# Altium PCB cm4-carrier-net.PcbDoc (part 1 of 2)
Units mm, origin at the board's own origin, x right, y up, seen from the top; angles counter-clockwise.
Board outline 91.42 x 56.51 mm, 4 copper layers (F.Cu, In1.Cu, In2.Cu, B.Cu); 70 components, 204 nets, 587 pads, 137 vias.
Unrouted connection lines stored in the file: 70.
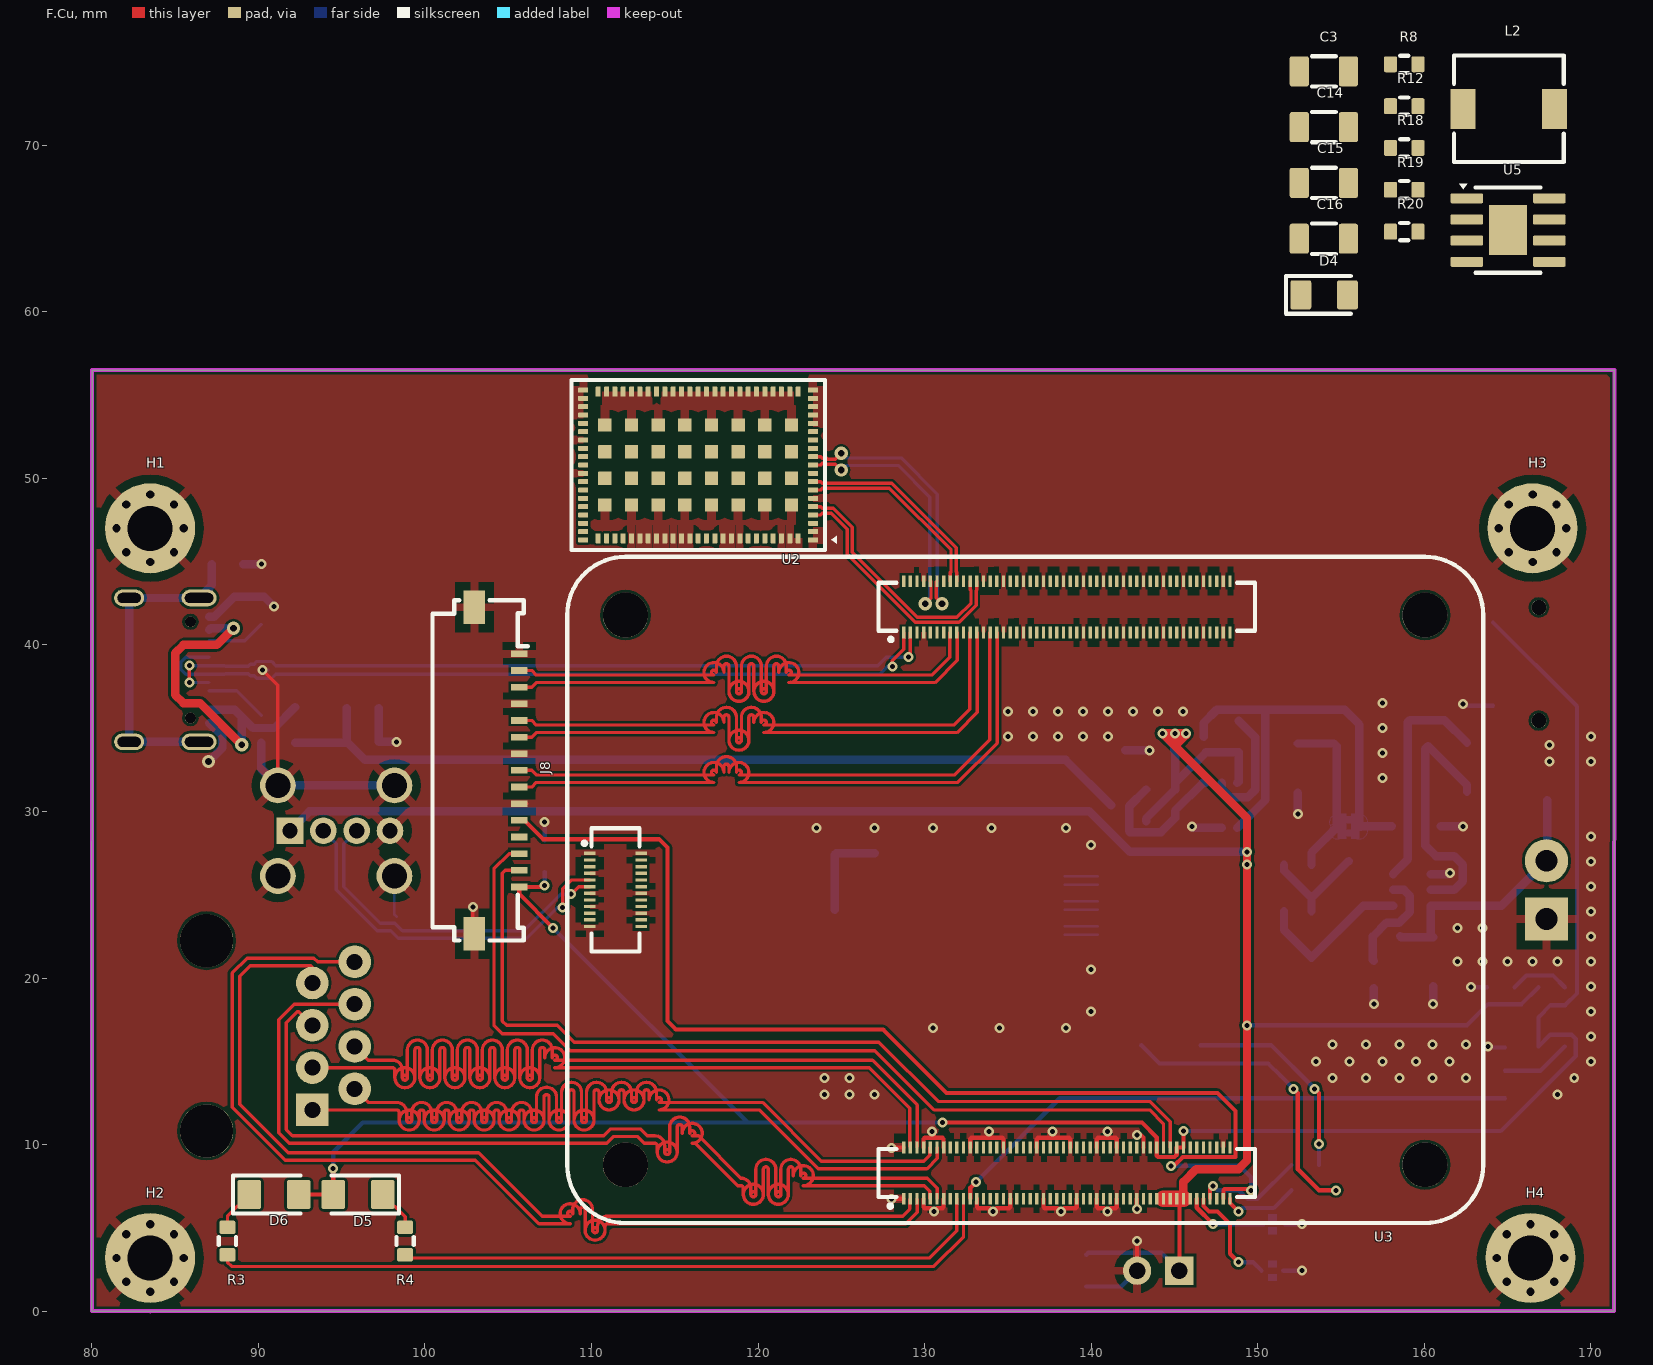
[diagram p0: F.Cu view]
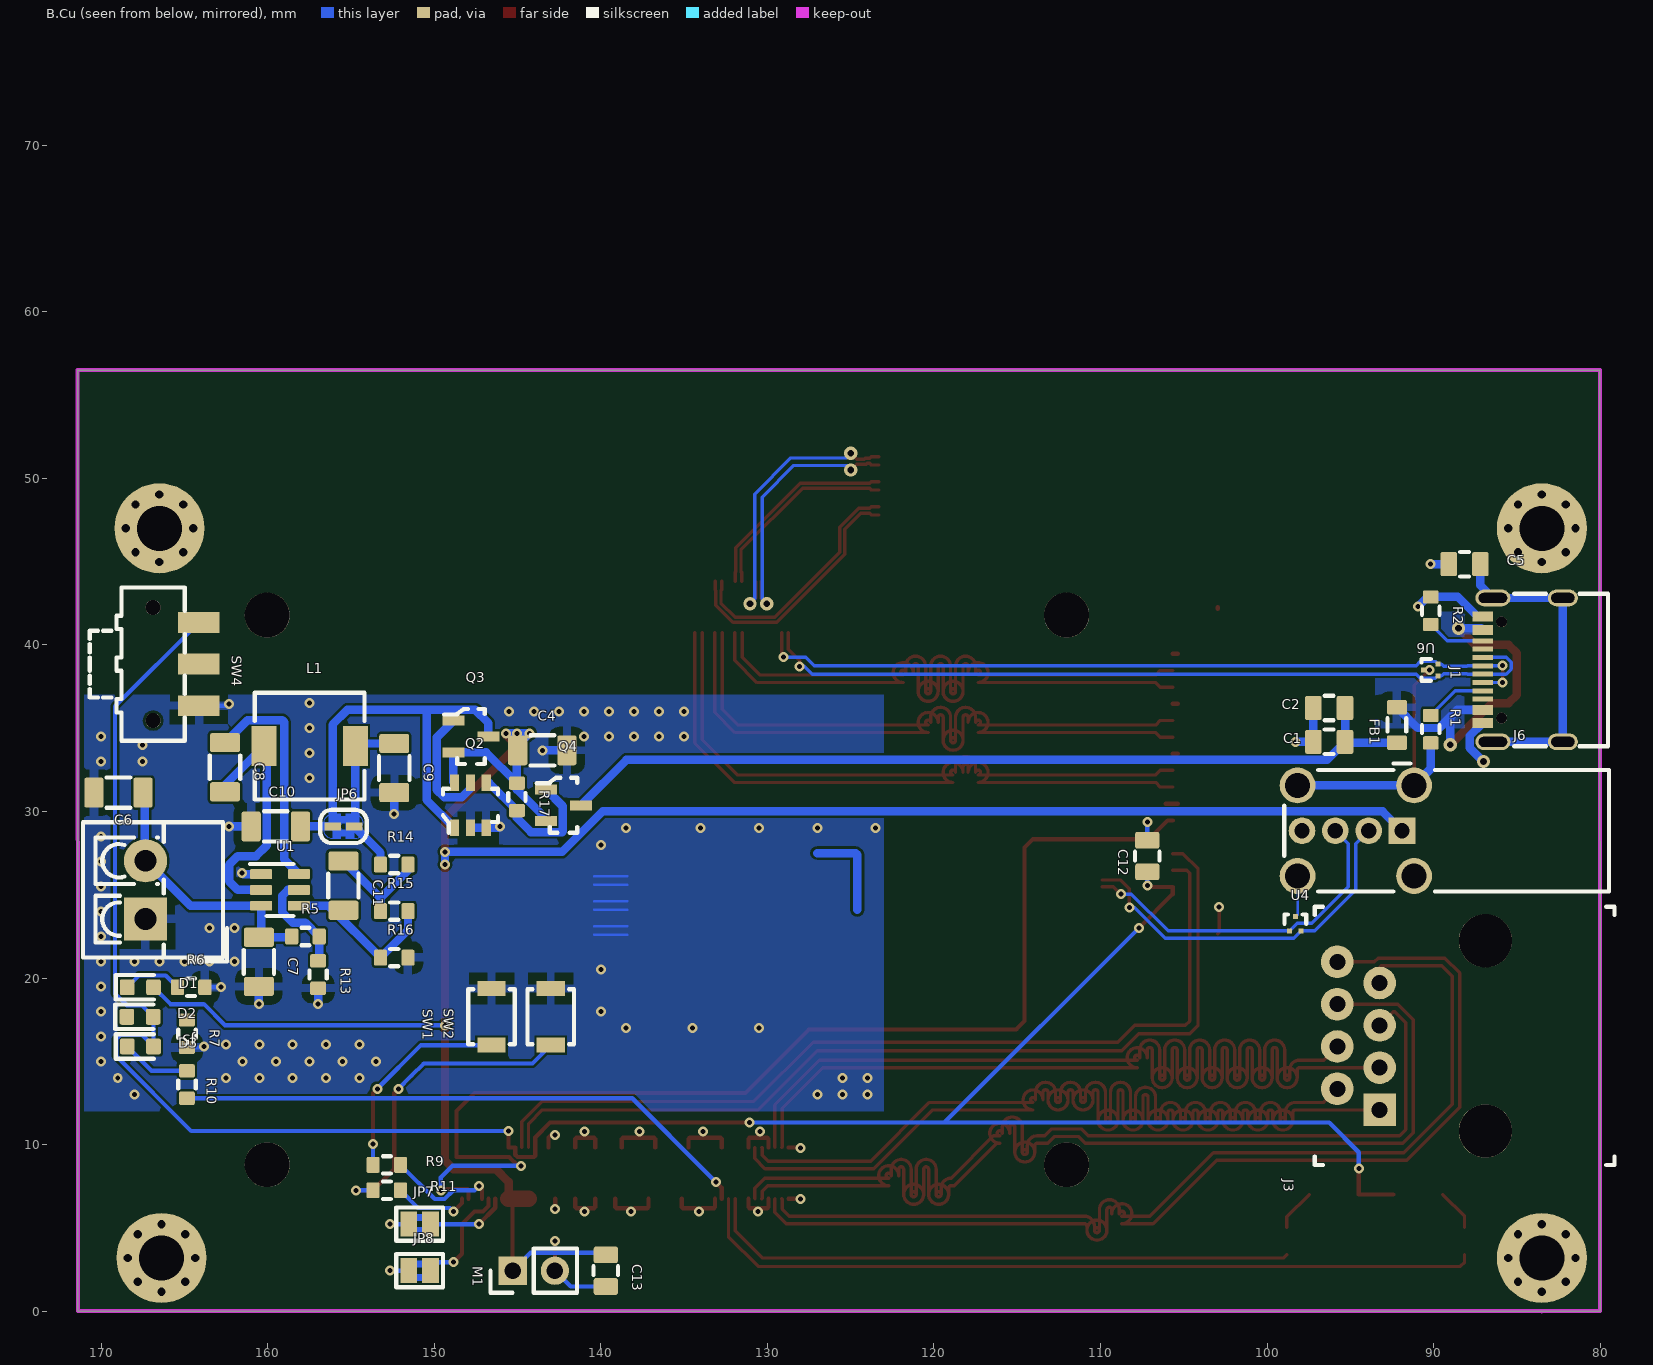
[diagram p1: B.Cu view, seen from below]
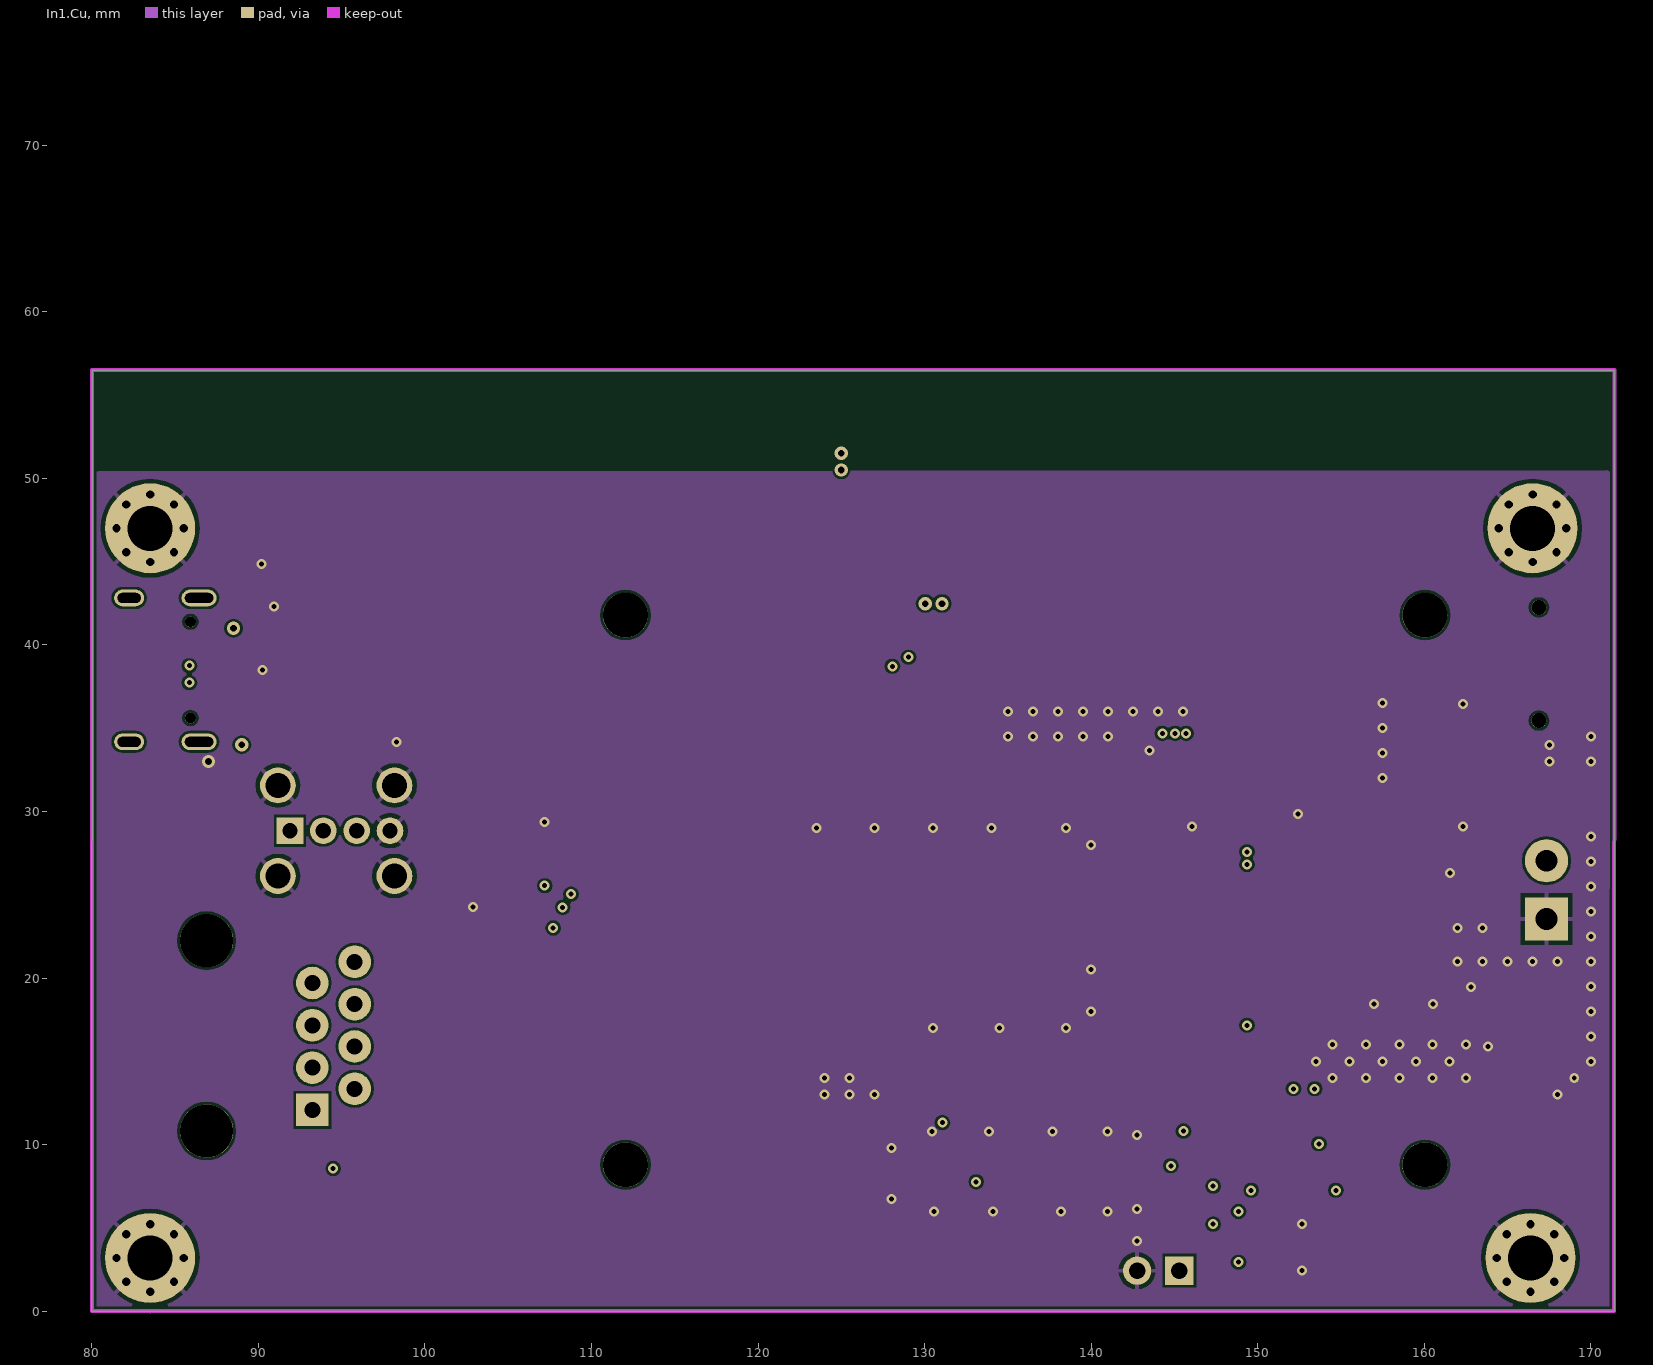
[diagram p2: In1.Cu]
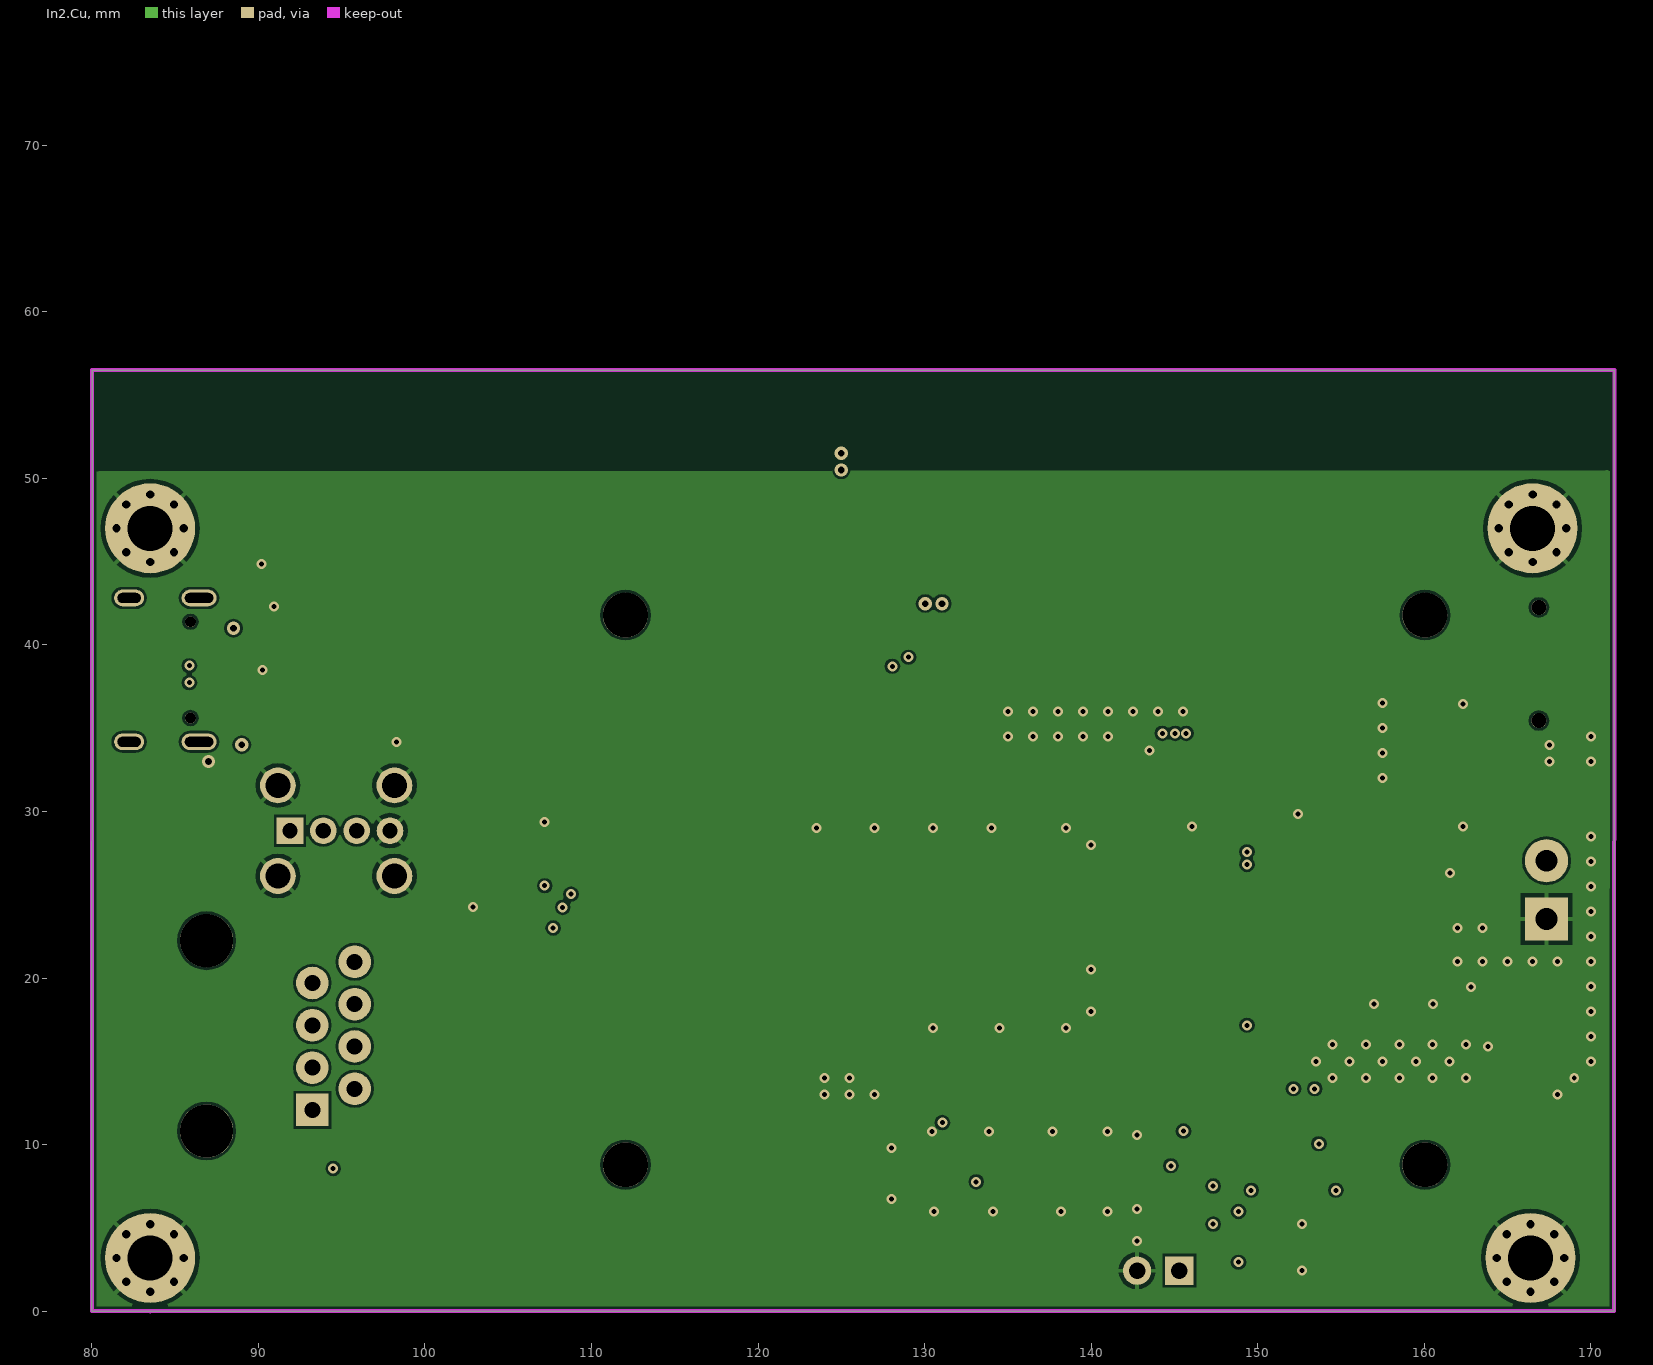
[diagram p3: In2.Cu]

## Layer stack, top to bottom
F.Mask: solder mask 0.0102, Solder Resist, Dk 3.5
F.Cu: signal copper 0.0356
Dielectric 1: dielectric 0.32, FR-4, Dk 4.8
In1.Cu: signal copper 0.0356
Dielectric2: dielectric 0.32, FR-4, Dk 4.8
In2.Cu: signal copper 0.0356
Dielectric3: dielectric 0.32, FR-4, Dk 4.8
B.Cu: signal copper 0.0356
B.Mask: solder mask 0.0102, Solder Resist, Dk 3.5

## Board outline
171.416,56.506 171.394,0.006 83.5,0 80,0.006 80.01,56.506 171.416,56.506

## Design rules (kind name [scope] priority, off if disabled: settings)
Clearance "Clearence 0.1524_Polygon" [InNamedPolygon('F.Cu-GND') OR InNamedPolygon('In1.Cu-GND') OR InNamedPolygon('In2.Cu-GND') OR InNamedPolygon('B.Cu-/USB_VBUS') OR InNamedPolygon('B.Cu-GND')] p1: gap=0.152 ignorepadtopadclearanceinfootprint=FALSE
MinimumSolderMaskSliver [All] p1: minsoldermaskwidth=0
PolygonConnect Polygon_B.Cu-GND_ConnectDirect [IsNamedPolygon('B.Cu-GND') vs IsVia] p1: connectstyle=Direct reliefconductorwidth=0.254 reliefentries=4 polygonreliefangle="90 Angle" airgapwidth=0.254
PolygonConnect Polygon_B.Cu-GND_ConnectRelief45 [IsNamedPolygon('B.Cu-GND') vs (IsThruPin or IsSMTPin) and (PadShape_AllLayers = 'Round')] p2: connectstyle=Relief reliefconductorwidth=0.5 reliefentries=4 polygonreliefangle="45 Angle" airgapwidth=0.5
PolygonConnect Polygon_B.Cu-GND_ConnectRelief90 [IsNamedPolygon('B.Cu-GND') vs (IsThruPin or IsSMTPin) and (PadShape_AllLayers <> 'Round')] p3: connectstyle=Relief reliefconductorwidth=0.5 reliefentries=4 polygonreliefangle="90 Angle" airgapwidth=0.5
PolygonConnect Polygon_B.Cu-/USB_VBUS_ConnectDirect [IsNamedPolygon('B.Cu-/USB_VBUS') vs IsVia] p4: connectstyle=Direct reliefconductorwidth=0.254 reliefentries=4 polygonreliefangle="90 Angle" airgapwidth=0.254
PolygonConnect Polygon_B.Cu-/USB_VBUS_ConnectRelief45 [IsNamedPolygon('B.Cu-/USB_VBUS') vs (IsThruPin or IsSMTPin) and (PadShape_AllLayers = 'Round')] p5: connectstyle=Relief reliefconductorwidth=0.5 reliefentries=4 polygonreliefangle="45 Angle" airgapwidth=0.5
PolygonConnect Polygon_B.Cu-/USB_VBUS_ConnectRelief90 [IsNamedPolygon('B.Cu-/USB_VBUS') vs (IsThruPin or IsSMTPin) and (PadShape_AllLayers <> 'Round')] p6: connectstyle=Relief reliefconductorwidth=0.5 reliefentries=4 polygonreliefangle="90 Angle" airgapwidth=0.5
PolygonConnect Polygon_In2.Cu-GND_ConnectDirect [IsNamedPolygon('In2.Cu-GND') vs IsVia] p7: connectstyle=Direct reliefconductorwidth=0.254 reliefentries=4 polygonreliefangle="90 Angle" airgapwidth=0.254
PolygonConnect Polygon_In2.Cu-GND_ConnectRelief45 [IsNamedPolygon('In2.Cu-GND') vs (IsThruPin or IsSMTPin) and (PadShape_AllLayers = 'Round')] p8: connectstyle=Relief reliefconductorwidth=0.254 reliefentries=4 polygonreliefangle="45 Angle" airgapwidth=0.254
PolygonConnect Polygon_In2.Cu-GND_ConnectRelief90 [IsNamedPolygon('In2.Cu-GND') vs (IsThruPin or IsSMTPin) and (PadShape_AllLayers <> 'Round')] p9: connectstyle=Relief reliefconductorwidth=0.254 reliefentries=4 polygonreliefangle="90 Angle" airgapwidth=0.254
PolygonConnect Polygon_In1.Cu-GND_ConnectDirect [IsNamedPolygon('In1.Cu-GND') vs IsVia] p10: connectstyle=Direct reliefconductorwidth=0.254 reliefentries=4 polygonreliefangle="90 Angle" airgapwidth=0.254
PolygonConnect Polygon_In1.Cu-GND_ConnectRelief45 [IsNamedPolygon('In1.Cu-GND') vs (IsThruPin or IsSMTPin) and (PadShape_AllLayers = 'Round')] p11: connectstyle=Relief reliefconductorwidth=0.254 reliefentries=4 polygonreliefangle="45 Angle" airgapwidth=0.254
PolygonConnect Polygon_In1.Cu-GND_ConnectRelief90 [IsNamedPolygon('In1.Cu-GND') vs (IsThruPin or IsSMTPin) and (PadShape_AllLayers <> 'Round')] p12: connectstyle=Relief reliefconductorwidth=0.254 reliefentries=4 polygonreliefangle="90 Angle" airgapwidth=0.254
PolygonConnect Polygon_F.Cu-GND_ConnectDirect [IsNamedPolygon('F.Cu-GND') vs IsVia] p13: connectstyle=Direct reliefconductorwidth=0.254 reliefentries=4 polygonreliefangle="90 Angle" airgapwidth=0.254
PolygonConnect Polygon_F.Cu-GND_ConnectRelief45 [IsNamedPolygon('F.Cu-GND') vs (IsThruPin or IsSMTPin) and (PadShape_AllLayers = 'Round')] p14: connectstyle=Relief reliefconductorwidth=0.5 reliefentries=4 polygonreliefangle="45 Angle" airgapwidth=0.5
PolygonConnect Polygon_F.Cu-GND_ConnectRelief90 [IsNamedPolygon('F.Cu-GND') vs (IsThruPin or IsSMTPin) and (PadShape_AllLayers <> 'Round')] p15: connectstyle=Relief reliefconductorwidth=0.5 reliefentries=4 polygonreliefangle="90 Angle" airgapwidth=0.5
RoutingVias [All] p1: holewidth=0.711 width=1.27 viastyle="Through Hole" minholewidth=0.711 minwidth=1.27 maxholewidth=0.711 maxwidth=1.27
SilkToSilkClearance [All] p1: silktosilkclearance=0
SilkToSolderMaskClearance [IsPad] p1: minsilkscreentomaskgap=0 clearancetoexposedcopper=TRUE
SolderMaskExpansion [All] p1: expansion=0.102 istentingtop=FALSE
Width [All] p1: maxlimit=10 minlimit=0.254 preferedwidth=0.254 minimp=50.000000 maximp=50.000000 favimp=50.000000
27 further rules are at their usual default settings.

## Components (designator, comment, footprint, x,y, rotation, side; value= is the part's Value field where it differs from the comment)
C1 "Comment" C_0805_2012Metric 96.266,34.184 r180 bottom value=22u
C2 "Comment" C_0805_2012Metric 96.266,36.216 r180 bottom value=22u
C3 "Comment" C_1206_3216Metric#1 153.965,74.441 r0 top value=10uF
C4 "Comment" C_1206_3216Metric#2 143.51,33.676 r0 bottom value=22uF
C5 "Comment" C_0805_2012Metric 88.138,44.852 r180 bottom value=100n
C6 "Comment" C_1206_3216Metric#2 168.959,31.136 r180 bottom value=10uF
C7 "Comment" C_1206_3216Metric#2 160.528,20.976 r90 bottom value=0.1uF
C8 "Comment" C_1206_3216Metric#2 162.56,32.66 r90 bottom value=0.1uF
C9 "Comment" C_1206_3216Metric#2 152.4,32.611 r90 bottom value=22uF
C10 "Comment" C_1206_3216Metric#2 159.512,29.104 r0 bottom value=22uF
C11 "Comment" C_1206_3216Metric#2 155.448,25.548 r90 bottom value=75pF
C12 "Comment" C_0805_2012Metric 107.188,27.326 r270 bottom value=22u
C13 "Comment" C_0805_2012Metric 139.7,2.434 r90 bottom value=22u
C14 "Comment" C_1206_3216Metric#1 153.965,71.091 r0 top value=0.1uF
C15 "Comment" C_1206_3216Metric#1 153.965,67.741 r0 top value=47uF
C16 "Comment" C_1206_3216Metric#1 153.965,64.391 r0 top value=47uF
D1 "Comment" LED_0603_1608Metric 167.64,19.452 r0 bottom value="USB Power"
D2 "Comment" LED_0603_1608Metric 167.665,17.674 r0 bottom value="RPi 3v3"
D3 "Comment" LED_0603_1608Metric 167.64,15.896 r0 bottom value="Activity LED"
D4 "Comment" D_1206_3216Metric 153.985,61.021 r0 top value=D
D5 "Comment" D_1206_3216Metric_Pad1.42x1.75mm_HandSolder 95.982,7.006 r180 top value=LED
D6 "Comment" D_1206_3216Metric_Pad1.42x1.75mm_HandSolder 90.932,7.006 r0 top value=LED
FB1 "Comment" L_0805_2012Metric 92.202,35.2 r270 bottom value=FB
H1 "Comment" MountingHole_2.7mm_M2.5_Pad_Via 83.5,47.006 r0 top value=MountingHole_Pad
H2 "Comment" MountingHole_2.7mm_M2.5_Pad_Via 83.5,3.196 r0 top value=MountingHole_Pad
H3 "Comment" MountingHole_2.7mm_M2.5_Pad_Via 166.5,47.006 r0 top value=MountingHole_Pad
H4 "Comment" MountingHole_2.7mm_M2.5_Pad_Via 166.37,3.196 r0 top value=MountingHole_Pad
J1 "Comment" USB_C_Receptacle_G-Switch_GT-USB-7010ASV 83.312,38.502 r270 bottom value=USB_C_Receptacle_USB2.0
J3 "Comment" Ethernet_Jack_54602-908LF 93.238,12.086 r270 bottom value=54602-908LF
J5 "Comment" TerminalBlock_4Ucon_1x02_P3.50mm_Vertical 167.333,23.544 r270 bottom value=block
J6 "Comment" USB_A_Wuerth_614004134726_Horizontal 91.898,28.85 r180 bottom value=USB_A
J8 "Comment" Molex_200528-0150_1x15-1MP_P1.00mm_Horizontal 104.754,32.47 r270 top value=Conn_01x15_MountingPin
JP6 "Comment" SolderJumper-2_P1.3mm_Bridged2Bar_RoundedPad1.0x1.5mm 155.448,29.104 r0 bottom value=SolderJumper_2_Bridged
JP7 "Comment" SolderJumper-2_P1.3mm_Bridged2Bar_Pad1.0x1.5mm 150.876,5.228 r0 bottom value=~WL_nDisable
JP8 "Comment" SolderJumper-2_P1.3mm_Bridged2Bar_Pad1.0x1.5mm 150.876,2.434 r0 bottom value=~BT_nDisable
L1 "Comment" L_6.3x6.3_H3#1 157.48,33.93 r0 bottom value=10uH
L2 "Comment" L_6.3x6.3_H3#2 165.075,72.191 r0 top value=0.1uH
M1 "Comment" PinHeader_1x02_P2.54mm_Vertical 145.293,2.434 r270 bottom value=Fan
Q2 "Comment" SOT-23-6#1 147.828,30.374 r0 bottom value=LTC4412ES6_TRMPBF
Q3 "Comment" SOT-23-3 147.794,34.504 r0 bottom value=IRLML6401TRPBF
Q4 "Comment" SOT-23-3 142.24,30.374 r0 bottom value=IRLML6401TRPBF
R1 "Comment" R_0603_1608Metric#1 90.17,34.946 r270 bottom value=5k1
R2 "Comment" R_0603_1608Metric#1 90.17,42.058 r90 bottom value=5k1
R3 "Comment" R_0603_1608Metric#2 88.138,4.212 r270 top value=220R
R4 "Comment" R_0603_1608Metric#2 98.806,4.212 r270 top value=220R
R5 "Comment" R_0603_1608Metric#1 157.734,22.5 r0 bottom value=511kOhm
R6 "Comment" R_0603_1608Metric#1 164.592,19.452 r0 bottom value=330R
R7 "Comment" R_0603_1608Metric#1 164.846,16.658 r90 bottom value=220R
R8 "Comment" R_0603_1608Metric#2 158.795,74.861 r0 top value=56kOhm
R9 "Comment" R_0603_1608Metric#1 152.845,8.784 r0 bottom value=220R
R10 "Comment" R_0603_1608Metric#1 164.846,13.61 r270 bottom value=220R
R11 "Comment" R_0603_1608Metric#1 152.845,7.26 r0 bottom value=220R
R12 "Comment" R_0603_1608Metric#2 158.795,72.351 r0 top value=10.2kOhm
R13 "Comment" R_0603_1608Metric#1 156.972,20.214 r90 bottom value=105kOhm
R14 "Comment" R_0603_1608Metric#1 152.4,26.818 r0 bottom value=49.9Ohm
R15 "Comment" R_0603_1608Metric#1 152.4,24.024 r0 bottom value=100kOhm
R16 "Comment" R_0603_1608Metric#1 152.4,21.23 r0 bottom value=13.3kOhm
R17 "Comment" R_0603_1608Metric#1 145.034,30.882 r90 bottom value=470kOhm
R18 "Comment" R_0603_1608Metric#2 158.795,69.841 r0 top value=100kOhm
R19 "Comment" R_0603_1608Metric#2 158.795,67.331 r0 top value=31.6kOhm
R20 "Comment" R_0603_1608Metric#2 158.795,64.821 r0 top value=10.2kOhm
SW1 "Comment" SW_SPST_B3U-1000P 146.558,17.674 r270 bottom value=BOOT
SW2 "Comment" SW_SPST_B3U-1000P 143.002,17.674 r270 bottom value=GLOBAL_EN
SW4 "Comment" SW_SPDT_CK-JS102011SAQN 166.878,38.854 r90 bottom value=USB_OTG
U1 "Comment" SOT-23-6#2 159.258,25.294 r0 bottom value=TPS54302
U2 "Comment" Google_Coral_SMT_TPU_Module 123.3,46.306 r180 top value=Google_Coral
U3 "Comment" MODULE_ORANGE_PI_CM4 136.036,25.294 r180 top value=ORANGE_PI_CM4
U4 "Comment" Texas_DRT-3 98.298,23.262 r0 bottom value=TPD2EUSB30
U5 "Comment" SOIC-8-1EP_3.9x4.9mm_P1.27mm_EP2.29x3mm 165.025,64.911 r0 top value=ADP2303ARDZ-3.3
U6 "Comment" Texas_DRT-3 90.17,38.502 r270 bottom value=TPD2EUSB30

## Footprints (in the part's own frame and the unit in brackets; to place one, negate y for a bottom-side part, rotate by r counter-clockwise, add the part's x,y. Pads: shape width x height; smd on the part's side, far side on the other; paste and mask are expansions set on the pad)
C_0805_2012Metric [mm]
  rrect25% 1x1.45 smd mask+0: 1(0.95,0) 2(-0.95,0)
  silkscreen extent -0.26,-0.73 0.26,0.73
C_1206_3216Metric#1 [mm]
  rrect22% 1.15x1.8 smd mask+0: 1(-1.475,0) 2(1.475,0)
  silkscreen extent -0.71,-0.91 0.71,0.91
C_1206_3216Metric#2 [mm]
  rrect22% 1.15x1.8 smd mask+0: 1(1.475,0) 2(-1.475,0)
  silkscreen extent -0.71,-0.91 0.71,0.91
D_1206_3216Metric [mm]
  rrect20% 1.25x1.75 smd mask+0: 1(-1.4,0) 2(1.4,0)
  silkscreen extent -2.28,-1.13 1.6,1.13
D_1206_3216Metric_Pad1.42x1.75mm_HandSolder [mm]
  rrect18% 1.425x1.75 smd mask+0: 1(-1.488,0) 2(1.488,0)
  silkscreen extent -2.46,-1.13 1.6,1.13
Ethernet_Jack_54602-908LF [mm]
  rect 1.96x1.96 hole 0.96 paste-2539.97 mask+0: 1(0,0)
  round 1.96 hole 0.96 paste-2539.97 mask+0: 2(-1.27,-2.54) 3(-2.54,0) 4(-3.81,-2.54) 5(-5.08,0) 6(-6.35,-2.54) 7(-7.62,0) 8(-8.89,-2.54)
  round 3.2 hole 3.2 paste-2539.97 mask+0: Un1(1.27,6.35) Un2(-10.16,6.35)
  silkscreen extent -12.2,-3.9 3.3,14.1
Google_Coral_SMT_TPU_Module [mm]
  rrect17% 0.6x0.3 smd mask+0: 1(0,0) 2(0,-0.5) 3(0,-1) 4(0,-1.5) 5(0,-2) 6(0,-2.5) 7(0,-3) 8(0,-3.5) 9(0,-4) 10(0,-4.5) 11(0,-5) 12(0,-5.5) 13(0,-6) 14(0,-6.5) 15(0,-7) 16(0,-7.5) 17(0,-8) 18(0,-8.5) 19(0,-9) 45(13.8,-9) 46(13.8,-8.5) 47(13.8,-8) 48(13.8,-7.5) 49(13.8,-7) 50(13.8,-6.5) 51(13.8,-6) 52(13.8,-5.5) 53(13.8,-5) 54(13.8,-4.5) 55(13.8,-4) 56(13.8,-3.5) 57(13.8,-3) 58(13.8,-2.5) 59(13.8,-2) 60(13.8,-1.5) 61(13.8,-1) 62(13.8,-0.5) 63(13.8,0)
  rrect17% 0.3x0.6 smd mask+0: 20(0.9,-8.9) 21(1.4,-8.9) 22(1.9,-8.9) 23(2.4,-8.9) 24(2.9,-8.9) 25(3.4,-8.9) 26(3.9,-8.9) 27(4.4,-8.9) 28(4.9,-8.9) 29(5.4,-8.9) 30(5.9,-8.9) 31(6.4,-8.9) 32(6.9,-8.9) 33(7.4,-8.9) 34(7.9,-8.9) 35(8.4,-8.9) 36(8.9,-8.9) 37(9.4,-8.9) 38(9.9,-8.9) 39(10.4,-8.9) 40(10.9,-8.9) 41(11.4,-8.9) 42(11.9,-8.9) 43(12.4,-8.9) 44(12.9,-8.9) 64(12.9,-0.1) 65(12.4,-0.1) 66(11.9,-0.1) 67(11.4,-0.1) 68(10.9,-0.1) 69(10.4,-0.1) 70(9.9,-0.1) 71(9.4,-0.1) 72(8.9,-0.1) 73(8.4,-0.1) 74(7.9,-0.1) 75(7.4,-0.1) 76(6.9,-0.1) 77(6.4,-0.1) 78(5.9,-0.1) 79(5.4,-0.1) 80(4.9,-0.1) 81(4.4,-0.1) 82(3.9,-0.1) 83(3.4,-0.1) 84(2.9,-0.1) 85(2.4,-0.1) 86(1.9,-0.1) 87(1.4,-0.1) 88(0.9,-0.1)
  rrect6% 0.8x0.8 smd mask+0: 89(12.5,-2.1) 90(10.9,-2.1) 91(9.3,-2.1) 92(7.7,-2.1) 93(6.1,-2.1) 94(4.5,-2.1) 95(2.9,-2.1) 96(1.3,-2.1) 97(12.5,-3.7) 98(10.9,-3.7) 99(9.3,-3.7) 100(7.7,-3.7) 101(6.1,-3.7) 102(4.5,-3.7) 103(2.9,-3.7) 104(1.3,-3.7) 105(12.5,-5.3) 106(10.9,-5.3) 107(9.3,-5.3) 108(7.7,-5.3) 109(6.1,-5.3) 110(4.5,-5.3) 111(2.9,-5.3) 112(1.3,-5.3) 113(12.5,-6.9) 114(10.9,-6.9) 115(9.3,-6.9) 116(7.7,-6.9) 117(6.1,-6.9) 118(4.5,-6.9) 119(2.9,-6.9) 120(1.3,-6.9)
  silkscreen extent -1.43,-9.61 14.51,0.61
L_6.3x6.3_H3#1 [mm]
  rect 1.5x2.4 smd mask+0: 1(2.75,0) 2(-2.75,0)
  silkscreen extent -3.3,-3.2 3.3,3.2
L_6.3x6.3_H3#2 [mm]
  rect 1.5x2.4 smd mask+0: 1(-2.75,0) 2(2.75,0)
  silkscreen extent -3.3,-3.2 3.3,3.2
L_0805_2012Metric [mm]
  rrect25% 0.875x1.2 smd mask+0: 1(1.062,0) 2(-1.062,0)
  silkscreen extent -0.4,-0.56 0.4,0.56
LED_0603_1608Metric [mm]
  rrect25% 0.875x0.95 smd mask+0: 1(0.787,0) 2(-0.787,0)
  silkscreen extent -0.8,-0.73 1.49,0.73
MODULE_ORANGE_PI_CM4 [mm]
  rect 0.2x0.7 smd paste-0.7 mask+0.102: JP1_1(7.3,18.54) JP1_2(7.3,15.46) JP1_3(6.9,18.54) JP1_4(6.9,15.46) JP1_5(6.5,18.54) JP1_6(6.5,15.46) JP1_7(6.1,18.54) JP1_8(6.1,15.46) JP1_9(5.7,18.54) JP1_10(5.7,15.46) JP1_11(5.3,18.54) JP1_12(5.3,15.46) JP1_13(4.9,18.54) JP1_14(4.9,15.46) JP1_15(4.5,18.54) JP1_16(4.5,15.46) JP1_17(4.1,18.54) JP1_18(4.1,15.46) JP1_19(3.7,18.54) JP1_20(3.7,15.46) JP1_21(3.3,18.54) JP1_22(3.3,15.46) JP1_23(2.9,18.54) JP1_24(2.9,15.46) JP1_25(2.5,18.54) JP1_26(2.5,15.46) JP1_27(2.1,18.54) JP1_28(2.1,15.46) JP1_29(1.7,18.54) JP1_30(1.7,15.46) JP1_31(1.3,18.54) JP1_32(1.3,15.46) JP1_33(0.9,18.54) JP1_34(0.9,15.46) JP1_35(0.5,18.54) JP1_36(0.5,15.46) JP1_37(0.1,18.54) JP1_38(0.1,15.46) JP1_39(-0.3,18.54) JP1_40(-0.3,15.46) JP1_41(-0.7,18.54) JP1_42(-0.7,15.46) JP1_43(-1.1,18.54) JP1_44(-1.1,15.46) JP1_45(-1.5,18.54) JP1_46(-1.5,15.46) JP1_47(-1.9,18.54) JP1_48(-1.9,15.46) JP1_49(-2.3,18.54) JP1_50(-2.3,15.46) JP1_51(-2.7,18.54) JP1_52(-2.7,15.46) JP1_53(-3.1,18.54) JP1_54(-3.1,15.46) JP1_55(-3.5,18.54) JP1_56(-3.5,15.46) JP1_57(-3.9,18.54) JP1_58(-3.9,15.46) JP1_59(-4.3,18.54) JP1_60(-4.3,15.46) JP1_61(-4.7,18.54) JP1_62(-4.7,15.46) JP1_63(-5.1,18.54) JP1_64(-5.1,15.46) JP1_65(-5.5,18.54) JP1_66(-5.5,15.46) JP1_67(-5.9,18.54) JP1_68(-5.9,15.46) JP1_69(-6.3,18.54) JP1_70(-6.3,15.46) JP1_71(-6.7,18.54) JP1_72(-6.7,15.46) JP1_73(-7.1,18.54) JP1_74(-7.1,15.46) JP1_75(-7.5,18.54) JP1_76(-7.5,15.46) JP1_77(-7.9,18.54) JP1_78(-7.9,15.46) JP1_79(-8.3,18.54) JP1_80(-8.3,15.46) JP1_81(-8.7,18.54) JP1_82(-8.7,15.46) JP1_83(-9.1,18.54) JP1_84(-9.1,15.46) JP1_85(-9.5,18.54) JP1_86(-9.5,15.46) JP1_87(-9.9,18.54) JP1_88(-9.9,15.46) JP1_89(-10.3,18.54) JP1_90(-10.3,15.46) JP1_91(-10.7,18.54) JP1_92(-10.7,15.46) JP1_93(-11.1,18.54) JP1_94(-11.1,15.46) JP1_95(-11.5,18.54) JP1_96(-11.5,15.46) JP1_97(-11.9,18.54) JP1_98(-11.9,15.46) JP1_99(-12.3,18.54) JP1_100(-12.3,15.46) JP2_1(7.3,-15.46) JP2_2(7.3,-18.54) JP2_3(6.9,-15.46) JP2_4(6.9,-18.54) JP2_5(6.5,-15.46) JP2_6(6.5,-18.54) JP2_7(6.1,-15.46) JP2_8(6.1,-18.54) JP2_9(5.7,-15.46) JP2_10(5.7,-18.54) JP2_11(5.3,-15.46) JP2_12(5.3,-18.54) JP2_13(4.9,-15.46) JP2_14(4.9,-18.54) JP2_15(4.5,-15.46) JP2_16(4.5,-18.54) JP2_17(4.1,-15.46) JP2_18(4.1,-18.54) JP2_19(3.7,-15.46) JP2_20(3.7,-18.54) JP2_21(3.3,-15.46) JP2_22(3.3,-18.54) JP2_23(2.9,-15.46) JP2_24(2.9,-18.54) JP2_25(2.5,-15.46) JP2_26(2.5,-18.54) JP2_27(2.1,-15.46) JP2_28(2.1,-18.54) JP2_29(1.7,-15.46) JP2_30(1.7,-18.54) JP2_31(1.3,-15.46) JP2_32(1.3,-18.54) JP2_33(0.9,-15.46) JP2_34(0.9,-18.54) JP2_35(0.5,-15.46) JP2_36(0.5,-18.54) JP2_37(0.1,-15.46) JP2_38(0.1,-18.54) JP2_39(-0.3,-15.46) JP2_40(-0.3,-18.54) JP2_41(-0.7,-15.46) JP2_42(-0.7,-18.54) JP2_43(-1.1,-15.46) JP2_44(-1.1,-18.54) JP2_45(-1.5,-15.46) JP2_46(-1.5,-18.54) JP2_47(-1.9,-15.46) JP2_48(-1.9,-18.54) JP2_49(-2.3,-15.46) JP2_50(-2.3,-18.54) JP2_51(-2.7,-15.46) JP2_52(-2.7,-18.54) JP2_53(-3.1,-15.46) JP2_54(-3.1,-18.54) JP2_55(-3.5,-15.46) JP2_56(-3.5,-18.54) JP2_57(-3.9,-15.46) JP2_58(-3.9,-18.54) JP2_59(-4.3,-15.46) JP2_60(-4.3,-18.54) JP2_61(-4.7,-15.46) JP2_62(-4.7,-18.54) JP2_63(-5.1,-15.46) JP2_64(-5.1,-18.54) JP2_65(-5.5,-15.46) JP2_66(-5.5,-18.54) JP2_67(-5.9,-15.46) JP2_68(-5.9,-18.54) JP2_69(-6.3,-15.46) JP2_70(-6.3,-18.54) JP2_71(-6.7,-15.46) JP2_72(-6.7,-18.54) JP2_73(-7.1,-15.46) JP2_74(-7.1,-18.54) JP2_75(-7.5,-15.46) JP2_76(-7.5,-18.54) JP2_77(-7.9,-15.46) JP2_78(-7.9,-18.54) JP2_79(-8.3,-15.46) JP2_80(-8.3,-18.54) JP2_81(-8.7,-15.46) JP2_82(-8.7,-18.54) JP2_83(-9.1,-15.46) JP2_84(-9.1,-18.54) JP2_85(-9.5,-15.46) JP2_86(-9.5,-18.54) JP2_87(-9.9,-15.46) JP2_88(-9.9,-18.54) JP2_89(-10.3,-15.46) JP2_90(-10.3,-18.54) JP2_91(-10.7,-15.46) JP2_92(-10.7,-18.54) JP2_93(-11.1,-15.46) JP2_94(-11.1,-18.54) JP2_95(-11.5,-15.46) JP2_96(-11.5,-18.54) JP2_97(-11.9,-15.46) JP2_98(-11.9,-18.54) JP2_99(-12.3,-15.46) JP2_100(-12.3,-18.54)
  rect 0.7x0.2 smd paste-0.7 mask+0.102: JP3_1(26.14,-2.2) JP3_2(23.06,-2.2) JP3_3(26.14,-1.8) JP3_4(23.06,-1.8) JP3_5(26.14,-1.4) JP3_6(23.06,-1.4) JP3_7(26.14,-1) JP3_8(23.06,-1) JP3_9(26.14,-0.6) JP3_10(23.06,-0.6) JP3_11(26.14,-0.2) JP3_12(23.06,-0.2) JP3_13(26.14,0.2) JP3_14(23.06,0.2) JP3_15(26.14,0.6) JP3_16(23.06,0.6) JP3_17(26.14,1) JP3_18(23.06,1) JP3_19(26.14,1.4) JP3_20(23.06,1.4) JP3_21(26.14,1.8) JP3_22(23.06,1.8) JP3_23(26.14,2.2) JP3_24(23.06,2.2)
  round 2.7 hole 2.7 paste-2539.97 mask+0: Un1(-24,16.5) Un2(-24,-16.5) Un3(24,16.5) Un4(24,-16.5)
  silkscreen extent -27.5,-20 27.5,20
Molex_200528-0150_1x15-1MP_P1.00mm_Horizontal [mm]
  rect 0.4x1 smd mask+0: 1(-7,0.91) 2(-6,0.91) 3(-5,0.91) 4(-4,0.91) 5(-3,0.91) 6(-2,0.91) 7(-1,0.91) 8(0,0.91) 9(1,0.91) 10(2,0.91) 11(3,0.91) 12(4,0.91) 13(5,0.91) 14(6,0.91) 15(7,0.91)
  rect 2x1.3 smd mask+0: MP(-9.8,-1.79) MP(9.8,-1.79)
  silkscreen extent -10.21,-4.3 10.21,1.41
MountingHole_2.7mm_M2.5_Pad_Via [mm]
  round 0.8 hole 0.5 paste-2539.97 mask+0: 1(-2.025,0) 1(-1.432,-1.432) 1(-1.432,1.432) 1(0,-2.025) 1(0,2.025) 1(1.432,-1.432) 1(1.432,1.432) 1(2.025,0)
  round 5.4 hole 2.7 paste-2539.97 mask+0: 1(0,0)
PinHeader_1x02_P2.54mm_Vertical [mm]
  rect 1.7x1.7 hole 1 paste-2539.97 mask+0: 1(0,0)
  rrect100% 1.7x1.7 hole 1 paste-2539.97 mask+0: 2(0,2.54)
  silkscreen extent -1.33,-1.33 1.33,3.87
R_0603_1608Metric#1 [mm]
  rrect25% 0.8x0.95 smd mask+0: 1(0.825,0) 2(-0.825,0)
  silkscreen extent -0.24,-0.52 0.24,0.52
R_0603_1608Metric#2 [mm]
  rrect25% 0.8x0.95 smd mask+0: 1(-0.825,0) 2(0.825,0)
  silkscreen extent -0.24,-0.52 0.24,0.52
SOIC-8-1EP_3.9x4.9mm_P1.27mm_EP2.29x3mm [mm]
  rrect25% 1.95x0.6 smd mask+0: 1(-2.475,1.905) 2(-2.475,0.635) 3(-2.475,-0.635) 4(-2.475,-1.905) 5(2.475,-1.905) 6(2.475,-0.635) 7(2.475,0.635) 8(2.475,1.905)
  rect 2.29x3 smd paste-3 mask+0: 9(0,0)
  rrect25% 0.92x1.21 on Top Paste mask-1.21: Un1(-0.57,0.75) Un2(-0.57,-0.75) Un3(0.57,0.75) Un4(0.57,-0.75)
  silkscreen extent -2.94,-2.56 1.95,2.8
SolderJumper-2_P1.3mm_Bridged2Bar_Pad1.0x1.5mm [mm]
  rect 1x1.5 smd paste-1.5 mask+0: 1(0.65,0) 2(-0.65,0)
  F.Cu region: -0.25,0.2 0.25,0.2 0.25,0.6 -0.25,0.6
  F.Cu region: -0.25,-0.6 0.25,-0.6 0.25,-0.2 -0.25,-0.2
  silkscreen extent -1.4,-1 1.4,1
SolderJumper-2_P1.3mm_Bridged2Bar_RoundedPad1.0x1.5mm [mm]
  rect 1x0.5 smd paste-1 mask+0: 1(0.65,0) 2(-0.65,0)
  F.Cu circle w0: c-0.65,-0.25 r0.5
  F.Cu circle w0: c-0.65,0.25 r0.5
  F.Cu circle w0: c0.65,-0.25 r0.5
  F.Cu circle w0: c0.65,0.25 r0.5
  F.Cu region: -0.65,-0.75 -0.15,-0.75 -0.15,0.75 -0.65,0.75
  F.Cu region: 0.15,-0.75 0.65,-0.75 0.65,0.75 0.15,0.75
  F.Cu region: -0.25,0.2 0.25,0.2 0.25,0.6 -0.25,0.6
  F.Cu region: -0.25,-0.6 0.25,-0.6 0.25,-0.2 -0.25,-0.2
  silkscreen extent -1.4,-1 1.4,1
SOT-23-3 [mm]
  rect 1.3x0.6 smd mask+0.07: 1(1.05,-0.95) 2(1.05,0.95) 3(-1.05,0)
  silkscreen extent -0.82,-1.65 1.6,1.65
SOT-23-6#1 [mm]
  rect 0.55x1 smd mask+0: 1(0.95,1.35) 2(0,1.35) 3(-0.95,1.35) 4(-0.95,-1.35) 5(0,-1.35) 6(0.95,-1.35)
  silkscreen extent -1.65,-1 1.65,1.65
SOT-23-6#2 [mm]
  rrect25% 1.325x0.6 smd mask+0: 1(1.138,-0.95) 2(1.138,0) 3(1.138,0.95) 4(-1.138,0.95) 5(-1.138,0) 6(-1.138,-0.95)
  silkscreen extent -0.8,-1.56 1.8,1.56
SW_SPDT_CK-JS102011SAQN [mm]
  rect 1.25x2.5 smd mask+0: 1(2.5,-2.75) 2(0,-2.75) 3(-2.5,-2.75)
  round 0.9 hole 0.9 paste-2539.97 mask+0: Un1(3.4,0) Un2(-3.4,0)
  silkscreen extent -4.6,-1.9 4.6,3.8
SW_SPST_B3U-1000P [mm]
  rect 0.9x1.7 smd mask+0: 1(1.7,0) 2(-1.7,0)
  silkscreen extent -1.65,-1.4 1.65,1.4
TerminalBlock_4Ucon_1x02_P3.50mm_Vertical [mm]
  rect 2.6x2.6 hole 1.3 paste-2539.97 mask+0: 1(0,0)
  round 2.6 hole 1.3 paste-2539.97 mask+0: 2(-3.5,0)
  silkscreen extent -5.81,-3.76 2.55,4.9
Texas_DRT-3 [mm]
  rect 0.3x0.3 smd mask+0: 1(0.35,0.425) 2(-0.35,0.425) 3(0,-0.425)
  silkscreen extent -0.65,-0.55 0.65,0
USB_A_Wuerth_614004134726_Horizontal [mm]
  rect 1.6x1.6 hole 0.92 paste-2539.97 mask+0: 1(0,0)
  round 1.6 hole 0.92 paste-2539.97 mask+0: 2(-2,0) 3(-4,0) 4(-6,0)
  round 2.15 hole 1.5 paste-2539.97 mask+0: 5(-6.27,-2.72) 5(-6.27,2.72) 5(0.73,-2.72) 5(0.73,2.72)
  silkscreen extent -7.07,-3.65 12.43,4.03
USB_C_Receptacle_G-Switch_GT-USB-7010ASV [mm]
  rect 0.6x1.24 smd mask+0: A1(3.2,-3.725) A4(2.4,-3.725) A9(-2.4,-3.725) A12(-3.2,-3.725) B1(-3.2,-3.725) B4(-2.4,-3.725) B9(2.4,-3.725) B12(3.2,-3.725)
  rect 0.3x1.24 smd mask+0: A5(1.25,-3.725) A6(0.25,-3.725) A7(-0.25,-3.725) A8(-1.25,-3.725) B5(-1.75,-3.725) B6(-0.75,-3.725) B7(0.75,-3.725) B8(1.75,-3.725)
  rrect100% 1x2.1 hole 1.7 slot 0.6 at 0 deg paste-2539.97 mask+0: S1(-4.32,-3.125) S1(4.32,-3.125)
  rrect100% 1x1.8 hole 1.4 slot 0.6 at 0 deg paste-2539.97 mask+0: S1(-4.32,1.075) S1(4.32,1.075)
  round 0.65 hole 0.65 paste-2539.97 mask+0: Un1(2.89,-2.605) Un2(-2.89,-2.605)
  silkscreen extent -4.58,-1.85 4.58,3.78

## Part data
C1 C2 C5 C12 C13: library part C_0805_2012Metric, "Capacitor SMD 0805 (2012 Metric), square (rectangular) end terminal, IPC_7351 nominal, (Body size source: IPC-SM-782 page 76, https://www.pcb-3d.com/wordpress/wp-content/uploads/ipc-sm-782a_amendment_1_and_2.pdf, https://docs.google.com/spreadsheets/d/1BsfQQcO9C6DZCsRaXUlFlo91Tg2WpOkGARC1WS5S8t0/edit?usp=sharing), generated with kicad-footprint-generator", Footprint=Capacitor_SMD:C_0805_2012Metric, ki_fp_filters=C_*
C3 C4 C6 C7 C8 C9 C10 C11 C14 C15 C16: library part C_1206_3216Metric, "Capacitor SMD 1206 (3216 Metric), square (rectangular) end terminal, IPC_7351 nominal, (Body size source: IPC-SM-782 page 76, https://www.pcb-3d.com/wordpress/wp-content/uploads/ipc-sm-782a_amendment_1_and_2.pdf), generated with kicad-footprint-generator", Footprint=Capacitor_SMD:C_1206_3216Metric, ki_fp_filters=C_*
D1 D2 D3: library part LED_0603_1608Metric, "LED SMD 0603 (1608 Metric), square (rectangular) end terminal, IPC_7351 nominal, (Body size source: http://www.tortai-tech.com/upload/download/2011102023233369053.pdf), generated with kicad-footprint-generator", Footprint=LED_SMD:LED_0603_1608Metric, ki_fp_filters="LED* LED_SMD:* LED_THT:*"
D4: library part D_1206_3216Metric, "Diode SMD 1206 (3216 Metric), square (rectangular) end terminal, IPC_7351 nominal, (Body size source: http://www.tortai-tech.com/upload/download/2011102023233369053.pdf), generated with kicad-footprint-generator", Footprint=Diode_SMD:D_1206_3216Metric, Description=Diode, Sim.Device=D, Sim.Pins="1=K 2=A", ki_fp_filters="TO-???* *_Diode_* *SingleDiode* D_*"
D5 D6: library part D_1206_3216Metric_Pad1.42x1.75mm_HandSolder, "Diode SMD 1206 (3216 Metric), square (rectangular) end terminal, IPC_7351 nominal, (Body size source: http://www.tortai-tech.com/upload/download/2011102023233369053.pdf), generated with kicad-footprint-generator", Footprint=Diode_SMD:D_1206_3216Metric_Pad1.42x1.75mm_HandSolder, ki_fp_filters="LED* LED_SMD:* LED_THT:*"
FB1: library part L_0805_2012Metric, "Inductor SMD 0805 (2012 Metric), square (rectangular) end terminal, IPC_7351 nominal, (Body size source: IPC-SM-782 page 80, https://www.pcb-3d.com/wordpress/wp-content/uploads/ipc-sm-782a_amendment_1_and_2.pdf), generated with kicad-footprint-generator", Footprint=Inductor_SMD:L_0805_2012Metric, ki_fp_filters="Inductor_* L_* *Ferrite*"
H1 H2 H3 H4: library part MountingHole_2.7mm_M2.5_Pad_Via, "Mounting Hole 2.7mm", Footprint=MountingHole:MountingHole_2.7mm_M2.5_Pad_Via, ki_fp_filters=MountingHole*Pad*
J1: library part USB_C_Receptacle_G-Switch_GT-USB-7010ASV, "USB Type C, right-angle, SMT, https://datasheet.lcsc.com/lcsc/2204071530_G-Switch-GT-USB-7010ASV_C2988369.pdf", Footprint=Connector_USB:USB_C_Receptacle_G-Switch_GT-USB-7010ASV, Datasheet=https://www.usb.org/sites/default/files/documents/usb_type-c.zip, ki_fp_filters=USB*C*Receptacle*
J3: library part Ethernet_Jack_54602-908LF, "http://portal.fciconnect.com/Comergent//fci/drawing/c-bmj-0102.pdf", MPN=54602-908LF, MANUFACTURER="Amphenol ICC (FCI)", Footprint=digikey-footprints:Ethernet_Jack_54602-908LF, Description="CONN MOD JACK 8P8C R/A UNSHLD", Category="Connectors, Interconnects", DK_Detail_Page=/product-detail/en/amphenol-icc-fci/54602-908LF/609-1046-ND/1001360, Digi-Key_PN=609-1046-ND, Family="Modular Connectors - Jacks", Status=Active
J5: library part TerminalBlock_4Ucon_1x02_P3.50mm_Vertical, "Terminal Block 4Ucon ItemNo. 10693, vertical (cable from top), 2 pins, pitch 3.5mm, size 8x8.3mm^2, drill diamater 1.3mm, pad diameter 2.6mm, see http://www.4uconnector.com/online/object/4udrawing/10693.pdf, script-generated with , script-generated using https://github.com/pointhi/kicad-footprint-generator/scripts/TerminalBlock_4Ucon", Footprint=TerminalBlock_4Ucon:TerminalBlock_4Ucon_1x02_P3.50mm_Vertical, ki_fp_filters=TerminalBlock*:*
J6: library part USB_A_Wuerth_614004134726_Horizontal, "USB A connector https://www.we-online.com/catalog/datasheet/614004134726.pdf", Footprint=Connector_USB:USB_A_Wuerth_614004134726_Horizontal, Datasheet=~, ki_fp_filters=USB*
J8: library part Molex_200528-0150_1x15-1MP_P1.00mm_Horizontal, "Molex Molex 1.00mm Pitch Easy-On BackFlip, Right-Angle, Bottom Contact FFC/FPC, 200528-0150, 15 Circuits (https://www.molex.com/pdm_docs/sd/2005280150_sd.pdf), generated with kicad-footprint-generator", Footprint=Connector_FFC-FPC:Molex_200528-0150_1x15-1MP_P1.00mm_Horizontal, ki_fp_filters=Connector*:*_1x??-1MP*
JP6: library part SolderJumper-2_P1.3mm_Bridged2Bar_RoundedPad1.0x1.5mm, "SMD Solder Jumper, 1x1.5mm, rounded Pads, 0.3mm gap, bridged with 2 copper strips", Footprint=Jumper:SolderJumper-2_P1.3mm_Bridged2Bar_RoundedPad1.0x1.5mm, ki_fp_filters=SolderJumper*Bridged*
JP7 JP8: library part SolderJumper-2_P1.3mm_Bridged2Bar_Pad1.0x1.5mm, "SMD Solder Jumper, 1x1.5mm Pads, 0.3mm gap, bridged with 2 copper strips", Footprint=Jumper:SolderJumper-2_P1.3mm_Bridged2Bar_Pad1.0x1.5mm, ki_fp_filters="SolderJumper*Bridged* Jumper* TestPoint*2Pads* TestPoint*Bridge*"
L1 L2: library part L_6.3x6.3_H3, "Choke, SMD, 6.3x6.3mm 3mm height", Footprint=Inductor_SMD:L_6.3x6.3_H3, ki_fp_filters="Choke_* *Coil* Inductor_* L_*"
  L2: Description=Inductor
M1: library part PinHeader_1x02_P2.54mm_Vertical, "Through hole straight pin header, 1x02, 2.54mm pitch, single row", Footprint=Connector_PinHeader_2.54mm:PinHeader_1x02_P2.54mm_Vertical, ki_fp_filters="PinHeader*P2.54mm* TerminalBlock*"
Q2: library part SOT-23-6, MPN=LTC4412ES6#TRMPBF, MANUFACTURER="Linear Technology/Analog Devices", Footprint=digikey-footprints:SOT-23-6, Datasheet=http://www.linear.com/docs/1527, Description="IC OR CTRLR SRC SELECT TSOT23-6", Category="Integrated Circuits (ICs)", DK_Datasheet_Link=http://www.linear.com/docs/1527, DK_Detail_Page=/product-detail/en/linear-technology-analog-devices/LTC4412ES6-TRMPBF/LTC4412ES6-TRMPBFCT-ND/890097, Digi-Key_PN=LTC4412ES6#TRMPBFCT-ND, Family="PMIC - OR Controllers, Ideal Diodes", Status=Active
Q3 Q4: library part SOT-23-3, MPN=IRLML6401TRPBF, MANUFACTURER="Infineon Technologies", Footprint=digikey-footprints:SOT-23-3, Datasheet=https://www.infineon.com/dgdl/irlml6401pbf.pdf?fileId=5546d462533600a401535668b96d2634, Description="MOSFET P-CH 12V 4.3A SOT-23", Category="Discrete Semiconductor Products", DK_Datasheet_Link=https://www.infineon.com/dgdl/irlml6401pbf.pdf?fileId=5546d462533600a401535668b96d2634, DK_Detail_Page=/product-detail/en/infineon-technologies/IRLML6401TRPBF/IRLML6401PBFCT-ND/812509, Digi-Key_PN=IRLML6401PBFCT-ND, Family="Transistors - FETs, MOSFETs - Single", Status=Active
R1 R2 R3 R4 R5 R6 R7 R8 R9 R10 R11 R12 R13 R14 R15 R16 R17 R18 R19 R20: library part R_0603_1608Metric, "Resistor SMD 0603 (1608 Metric), square (rectangular) end terminal, IPC_7351 nominal, (Body size source: IPC-SM-782 page 72, https://www.pcb-3d.com/wordpress/wp-content/uploads/ipc-sm-782a_amendment_1_and_2.pdf), generated with kicad-footprint-generator", Footprint=Resistor_SMD:R_0603_1608Metric, ki_fp_filters=R_*
SW1 SW2: library part SW_SPST_B3U-1000P, "Ultra-small-sized Tactile Switch with High Contact Reliability, Top-actuated Model, without Ground Terminal, without Boss", Footprint=Button_Switch_SMD:SW_SPST_B3U-1000P
SW4: library part SW_SPDT_CK-JS102011SAQN, "Sub-miniature slide switch, right-angle, http://www.ckswitches.com/media/1422/js.pdf", Footprint=Button_Switch_SMD:SW_SPDT_CK-JS102011SAQN
U1: library part SOT-23-6, "SOT, 6 Pin (https://www.jedec.org/sites/default/files/docs/Mo-178c.PDF variant AB), generated with kicad-footprint-generator ipc_gullwing_generator.py", Footprint=Package_TO_SOT_SMD:SOT-23-6, Datasheet=http://www.ti.com/lit/ds/symlink/tps54302.pdf, ki_fp_filters=SOT?23*
U2: library part Google_Coral_SMT_TPU_Module, "Google_Coral_SMT_TPU_Module (https://coral.ai/static/files/Coral-Accelerator-Module-datasheet.pdf)", Footprint=TPU:Google_Coral_SMT_TPU_Module, Datasheet=https://coral.ai/static/files/Coral-Accelerator-Module-datasheet.pdf, Description="Edge TPU, 4 TOPS, 2W, 120-LGA", ki_fp_filters=GOOGLE*CORAL*
U3: library part MODULE_ORANGE_PI_CM4, MANUFACTURER="Orange Pi", MAXIMUM_PACKAGE_HEIGHT=5.1mm, Package="Custom_CM4 Orange Pi", Footprint=Orange-Pi-CM4:MODULE_ORANGE_PI_CM4, Description="\nOrange Pi Compute Module 4\n", Availability="Not in stock", Check_prices=https://www.snapeda.com/parts/Orange%20Pi%20CM4/Orange+Pi/view-part/?ref=eda, MF="Orange Pi", MP="Orange Pi CM4", PARTREV=v1.2, Price=None, STANDARD="Manufacturer Recommendations", SnapEDA_Link=https://www.snapeda.com/parts/Orange%20Pi%20CM4/Orange+Pi/view-part/?ref=snap
U4 U6: library part Texas_DRT-3, "Texas Instrument DRT-3 1x0.8mm Pitch 0.7mm http://www.ti.com/lit/ds/symlink/tpd2eusb30.pdf", Footprint=Package_TO_SOT_SMD:Texas_DRT-3, Datasheet=http://www.ti.com/lit/ds/symlink/tpd2eusb30a.pdf, ki_fp_filters=Texas*DRT*
U5: library part SOIC-8-1EP_3.9x4.9mm_P1.27mm_EP2.29x3mm, "SOIC, 8 Pin (https://www.analog.com/media/en/technical-documentation/data-sheets/ada4898-1_4898-2.pdf#page=29), generated with kicad-footprint-generator ipc_gullwing_generator.py", Footprint=Package_SO:SOIC-8-1EP_3.9x4.9mm_P1.27mm_EP2.29x3mm, Datasheet=https://www.analog.com/media/en/technical-documentation/data-sheets/ADP2302_2303.pdf, Description="Nonsynchronous Step-Down Regulator 3 Amp Vout 3.3v SOIC-8", ki_fp_filters=SOIC*1EP*3.9x4.9mm*P1.27mm*

## Via types
v1: diameter 0.6, hole 0.3, F.Cu to B.Cu, tented both sides, 130 vias
v2: diameter 0.8, hole 0.4, F.Cu to B.Cu, tented both sides, 7 vias

## Nets (pads, with @x,y where several pads share a name; then routed paths per layer and width w, separated by ;. In a path a pad name is that pad's centre, name@x,y a point inside that pad or via, vN(x,y) a via of type N, cw(c..) or ccw(c..) an arc to the next point about the centre after c; other vN are vias at no path point)
3.3v_HC: C15.1 C16.1 L2.2 R19.1 U2.56 U2.57 U2.58 U2.59 U2.60 U2.61 U2.62 U2.63 U2.64 U2.65 U2.66 U2.67 | length 5.7
  B.Cu w0.508: 124.6,24.11 124.6,27.406 124.7,27.506 125.5,27.506 126.996,27.506
5v_From_Bot: C10.2 JP6.1 Q2.1 Q3.3 | length 26.7
  B.Cu w0.508: Q3.3@146.744,34.504 146.744,35.312 147.54,36.108 149.714,36.108 155.21,36.108 156.098,35.22 JP6.1@156.098,29.104 C10.2@158.037,29.104 ; Q2.1@148.778,29.024 150.456,30.702 150.456,36.108
5v_From_USB: C1.1 C2.1 FB1.1 Q4.3 | length 52.6
  B.Cu w0.508: FB1.1@92.202,34.137 95.269,34.137 C1.1@95.316,34.184 ; C2.1@95.316,36.216 C1.1@95.316,34.184 ; Q4.3@141.19,30.374 138.459,33.105 96.395,33.105 C1.1@95.316,34.184
+1V8: U2.54 U3.JP1_88 U3.JP1_90
+3.3V: C12.1 D2.2 D3.2 D5.2 D6.2 J8.15 SW4.1 U3.JP1_78 U3.JP1_84 U3.JP1_86 | length 139.7
  F.Cu w0.254: D6.2@92.42,7.006 D5.2@94.494,7.006 94.494,8.56 v1(94.488,8.567) ; v1(107.188,25.548) 107.11,25.47 J8.15@105.664,25.47 105.664,25.04 v1(107.696,23.008) ; v1(131.064,11.324) 132.08,11.324 143.05,11.324 143.936,10.438 U3.JP1_78@143.936,9.834 143.936,9.33 144.009,9.257 144.999,9.257 145.136,9.394 U3.JP1_84@145.136,9.834 U3.JP1_86@145.536,9.834 145.542,9.84 v1(145.542,10.816)
  B.Cu w0.254: v1(94.488,8.567) 94.488,9.546 96.266,11.324 119.38,11.324 ; v1(107.188,25.548) C12.1@107.188,26.376 ; v1(107.696,23.008) 119.38,11.324 ; v1(131.064,11.324) 119.38,11.324 ; v1(145.542,10.816) 146.05,10.816 164.592,10.816 169.092,15.316 169.092,16.343 168.837,16.598 167.555,16.598 D3.2@166.853,15.896 166.853,17.648 D2.2@166.878,17.674 167.58,18.376 168.463,18.376 169.164,19.077 169.164,36.318 SW4.1@164.128,41.354
+5V: C4.1 C13.1 D1.2 J6.1 M1.1 Q2.6 Q3.2 Q4.2 R17.1 U3.JP1_77 U3.JP1_79 U3.JP1_81 U3.JP1_83 U3.JP1_85 U3.JP1_87 | length 140.3
  F.Cu w0.254: U3.JP1_83@145.136,6.754 145.293,6.597 M1.1@145.293,2.434
  F.Cu w0.508: v1(145.034,34.692) 145.034,33.93 ; U3.JP1_85@145.536,6.754 145.536,7.762 146.304,8.53 148.844,8.53 149.352,9.038 v1(149.352,17.166) 149.352,29.612 145.034,33.93 ; 145.034,33.93 v1(144.272,34.692) v1(145.694,34.692) 145.694,34.59 145.034,33.93
  F.Cu w1.016: U3.JP1_79@144.336,6.754 U3.JP1_85@145.536,6.754
  B.Cu w0.254: C13.1@139.7,3.384 139.827,3.511 144.216,3.511 M1.1@145.293,2.434 ; v1(149.352,17.166) 162.56,17.166 163.83,18.436 165.837,18.436 D1.2@166.853,19.452
  B.Cu w0.508: J6.1@91.898,28.85 93.06,30.012 139.894,30.012 142.326,27.58 v1(149.352,27.58) v1(149.352,26.818) ; Q4.2@143.29,29.424 143.29,29.577 145.034,31.321 R17.1@145.034,31.707 ; v1(145.694,34.692) v1(145.034,34.692) v1(144.272,34.692) 144.985,33.979 C4.1@144.985,33.676 145.034,33.627 R17.1@145.034,31.707 ; Q2.6@148.778,31.724 148.844,31.79 Q3.2@148.844,33.554 146.881,33.554 R17.1@145.034,31.707
+12V: C3.1 C6.1 C7.1 J5.2 R5.1 R8.1 R18.2 U1.3 U5.2 | length 15.6
  B.Cu w0.508: R5.1@158.559,22.5 158.608,22.451 C7.1@160.528,22.451 160.396,22.583 U1.3@160.396,24.344 164.633,24.344 J5.2@167.333,27.044 167.386,27.097 C6.1@167.386,30.677
CAMERA_PDN: J8.11 U3.JP1_97 | length 71.3
  F.Cu w0.254: J8.11@105.664,29.47 105.964,29.47 107.092,28.342 114.046,28.342 114.554,27.834 114.554,17.42 115.062,16.912 127.508,16.912 131.318,13.102 147.574,13.102 148.663,12.013 148.663,9.257 145.5,9.257 144.973,8.73 v1(144.78,8.73) ; U3.JP1_97@147.936,6.754 147.936,7.258 148.009,7.331 149.535,7.331 v1(149.606,7.26)
  B.Cu w0.254: v1(144.78,8.73) 148.898,8.73 149.606,8.022 v1(149.606,7.26)
E0_LEDL: U3.JP1_15
E0_TR0+: J3.1 U3.JP1_12 | length 103.6
  F.Cu w0.2: J3.1@93.238,12.086 98.298,12.086 cw(c98.298,11.936) 98.448,11.936 98.448,11.476 cw(c99.048,11.476) 99.048,10.876 cw(c99.048,11.476) 99.648,11.476 99.648,11.936 cw(c99.798,11.936) 99.798,12.086 cw(c99.798,11.936) 99.948,11.936 99.948,11.476 cw(c100.548,11.476) 100.548,10.876 cw(c100.548,11.476) 101.148,11.476 101.148,11.936 cw(c101.298,11.936) 101.298,12.086 cw(c101.298,11.936) 101.448,11.936 101.448,11.476 cw(c102.048,11.476) 102.048,10.876 cw(c102.048,11.476) 102.648,11.476 102.648,11.936 cw(c102.798,11.936) 102.798,12.086 cw(c102.798,11.936) 102.948,11.936 102.948,11.476 cw(c103.548,11.476) 103.548,10.876 cw(c103.548,11.476) 104.148,11.476 104.148,11.936 cw(c104.298,11.936) 104.298,12.086 cw(c104.298,11.936) 104.448,11.936 104.448,11.476 cw(c105.048,11.476) 105.048,10.876 cw(c105.048,11.476) 105.648,11.476 105.648,11.936 cw(c105.798,11.936) 105.798,12.086 cw(c105.798,11.936) 105.948,11.936 105.948,11.476 cw(c106.548,11.476) 106.548,10.876 cw(c106.548,11.476) 107.148,11.476 107.148,11.936 107.148,12.876 cw(c107.263,12.876) 107.263,12.991 107.333,12.991 cw(c107.333,12.876) 107.448,12.876 107.448,12.536 107.448,11.476 cw(c108.048,11.476) 108.048,10.876 cw(c108.048,11.476) 108.648,11.476 108.648,12.086 108.648,13.145 cw(c108.798,13.145) 108.798,13.295 cw(c108.798,13.145) 108.948,13.145 108.948,12.536 108.948,11.476 cw(c109.548,11.476) 109.548,10.876 cw(c109.548,11.476) 110.148,11.476 110.148,12.086 110.148,13.145 cw(c110.298,13.145) 110.298,13.295 cw(c110.298,13.145) 110.448,13.145 110.448,12.686 cw(c111.048,12.686) 111.048,12.086 cw(c111.048,12.686) 111.648,12.686 111.648,13.145 cw(c111.798,13.145) 111.798,13.295 cw(c111.798,13.145) 111.948,13.145 111.948,12.686 cw(c112.548,12.686) 112.548,12.086 cw(c112.548,12.686) 113.148,12.686 113.148,13.145 cw(c113.298,13.145) 113.298,13.295 cw(c113.298,13.145) 113.448,13.145 113.448,12.686 cw(c114.048,12.686) 114.048,12.086 114.986,12.086 120.078,12.086 123.605,8.559 130.141,8.559 130.761,9.179 130.761,9.809 U3.JP1_12@130.736,9.834